# Altium PCB panel.PcbDoc
Units mil, origin at the board's own origin, x right, y up, seen from the top; angles counter-clockwise.
Board outline 6000 x 4000 mil, 2 copper layers (Top Layer, Bottom Layer); 11 components, 14 nets, 45 pads, 0 vias.
Unrouted connection lines stored in the file: 26.
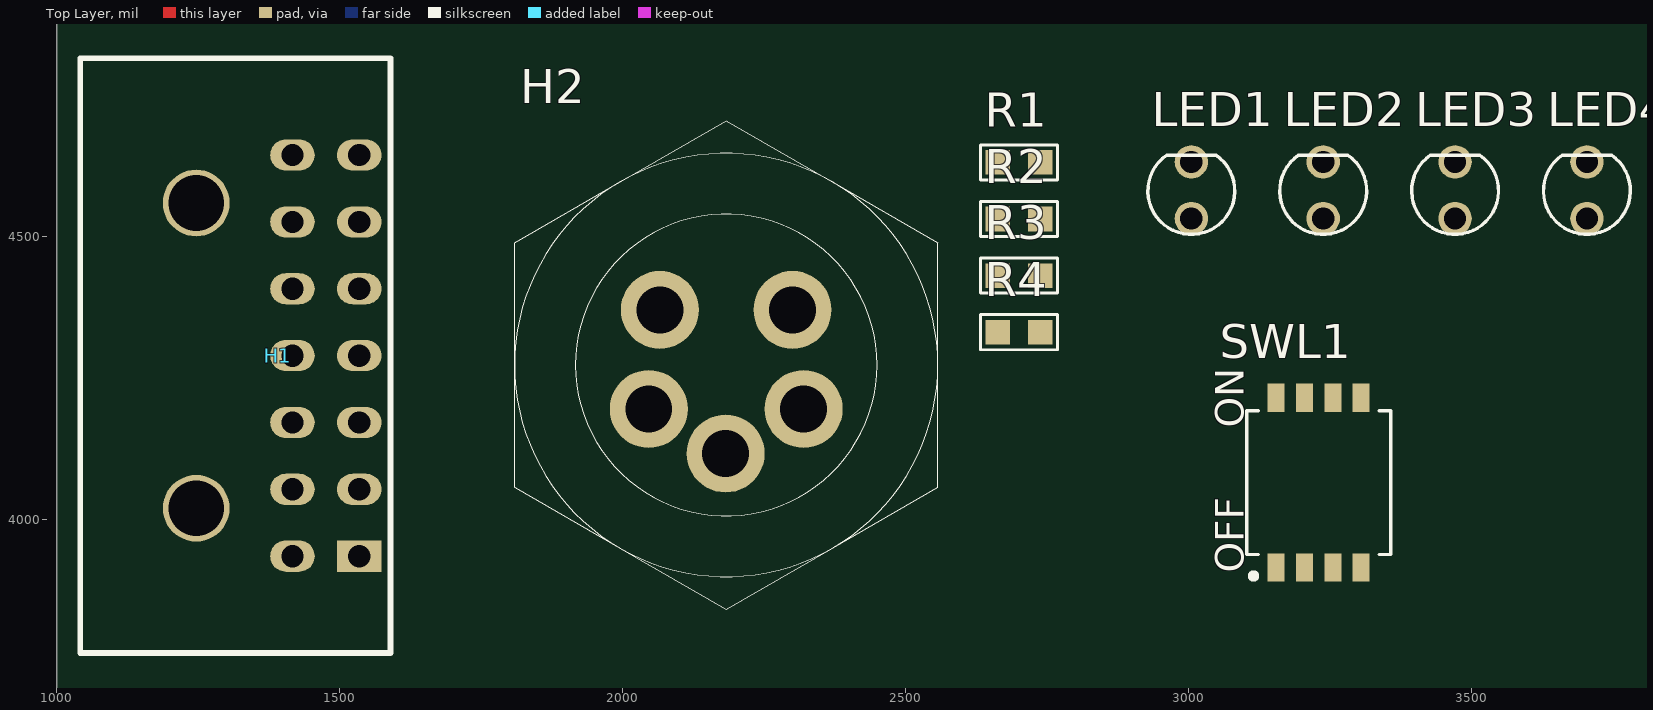
[diagram p0: Top Layer view]
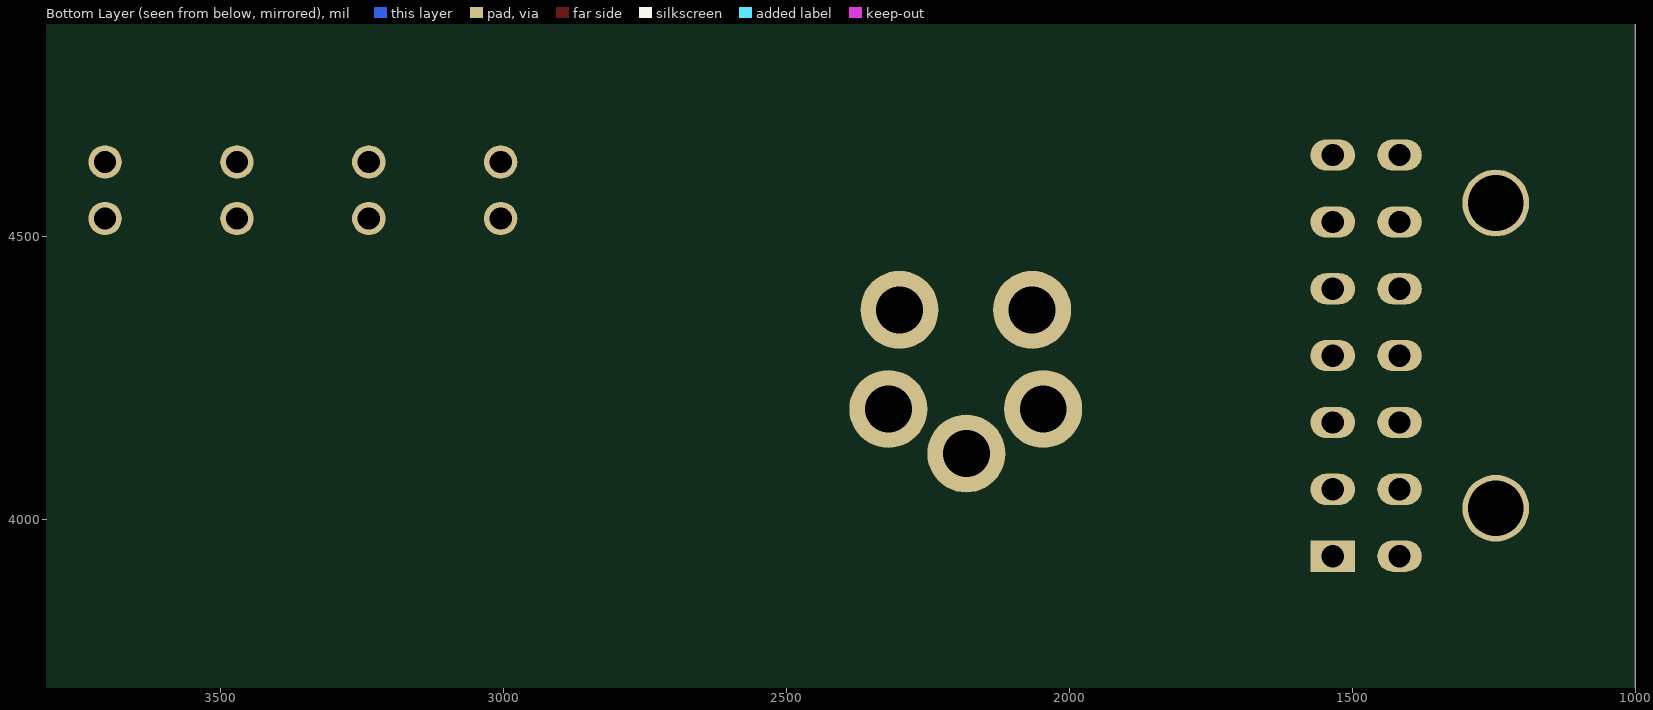
[diagram p1: Bottom Layer view, seen from below]

## Layer stack, top to bottom
Top Solder: solder mask 0.4, Solder Resist, Dk 3.5
Top Layer: signal copper 1.4
Dielectric 1: dielectric 12.6, FR-4, Dk 4.8
Bottom Layer: signal copper 1.4
Bottom Solder: solder mask 0.4, Solder Resist, Dk 3.5

## Board outline
1000,1000 7000,1000 7000,5000 1000,5000

## Design rules (kind name [scope] priority, off if disabled: settings)
Clearance [All] p1: gap=10 ignorepadtopadclearanceinfootprint=FALSE
DiffPairsRouting [All] p1: maxlimit=10 minlimit=10 mostfreqgap=10 toplayer_minwidth=15 toplayer_maxwidth=15 toplayer_prefwidth=15 bottomlayer_minwidth=15 bottomlayer_maxwidth=15 bottomlayer_prefwidth=15 maxuncoupledlength=500
PolygonConnect [All] p1: connectstyle=Relief reliefconductorwidth=10 reliefentries=4 polygonreliefangle="90 Angle" airgapwidth=10
RoutingVias [All] p1: holewidth=28 width=50 viastyle="Through Hole" minholewidth=28 minwidth=50 maxholewidth=28 maxwidth=50
SolderMaskExpansion [All] p1: expansion=4 istentingtop=FALSE
SupplyNets "Schematic Supply Nets_3" [InNet('12V')] p1: voltage=0.000
SupplyNets "Schematic Supply Nets_2" [InNet('3.3V')] p2: voltage=0.000
SupplyNets "Schematic Supply Nets_1" [InNet('GND-ISO')] p3: voltage=0.000
SupplyNets "Schematic Supply Nets" [InNet('GND')] p4: voltage=0.000
Width [All] p1: maxlimit=10 minlimit=10 preferedwidth=10
29 further rules are at their usual default settings.

## Classes and differential pairs
differential pair CAN: +CAN_P -CAN_N

## Components (designator, comment, footprint, x,y, rotation, side; value= is the part's Value field where it differs from the comment)
H1 "MHDR_2X07" "miniATX 2 × 7" 1535,3935 r180 top
H2 "GTX16-5" GX16-5PIN 2183.19,4272.76 r90 top
LED1 "Red" "LED 3mm" 3001.06,4580 r0 top
LED2 "Red" "LED 3mm" 3234.04,4580 r0 top
LED3 "Red" "LED 3mm" 3467.02,4580 r0 top
LED4 "Red" "LED 3mm" 3700,4580 r0 top
R1 "10K" RES0603 2705,4625 r0 top
R2 "10K" RES0603 2705,4525 r0 top
R3 "10K" RES0603 2705,4425 r0 top
R4 "10K" RES0603 2705,4325 r0 top
SWL1 "1571983-4" SW4_1571983_4P_TEC 3230,4065 r90 top

## Footprints (in the part's own frame and the unit in brackets; to place one, negate y for a bottom-side part, rotate by r counter-clockwise, add the part's x,y. Pads: shape width x height; smd on the part's side, far side on the other; paste and mask are expansions set on the pad)
GX16-5PIN [mm]
  round 3.5 hole 2.1 paste-2539.97 mask+0: 1(2.475,-2.975) 2(-1.975,-3.475) 3(-3.975,0.025) 4(-1.975,3.475) 5(2.475,2.975)
  silkscreen extent -10.97,-9.5 10.97,9.5, body extent -10.97,-9.5 10.97,9.5, height 16.6
"LED 3mm" [mm]
  round 1.5 hole 1: 1(0.1,1.31) 2(0.1,-1.23)
  silkscreen extent -1.85,-1.94 2.05,1.61, body extent -1.85,-1.93 2.05,1.64, height 10.3
"miniATX 2 × 7" [mm]
  round 3 hole 2.5: 0(7.32,-2.15) 0(7.32,-15.85)
  rect 2x1.4 hole 1: 1(0,0)
  oval 2x1.4 hole 1: 2(0,-3) 3(0,-6) 4(0,-9) 5(0,-12) 6(0,-15) 7(0,-18) 8(3,0) 9(3,-3) 10(3,-6) 11(3,-9) 12(3,-12) 13(3,-15) 14(3,-18)
  silkscreen extent -1.4,-22.34 12.52,4.34, body extent -0.33,-21.64 11.91,3.56, height 8.83
RES0603 [mm]
  rect 1.1x1.1 smd: 1(0.833,0.145) 2(-1.067,0.145)
  silkscreen extent -1.84,-0.64 1.61,0.93, body extent -0.97,-0.33 0.73,0.62, height 0.6
SW4_1571983_4P_TEC [mil]
  rect 50x30 smd paste+0 mask+0: 1(-150,75) 2(-150,25) 3(-150,-25) 4(-150,-75) 5(150,-75) 6(150,-25) 7(150,25) 8(150,75)
  silkscreen extent -170,-127 127,127, body extent -170,-124 150,120, height 91

## Part data
H1: library part "HDR_mini_2 × 7", "Male Header 2X07"
H2: library part Header1*5, LatestRevisionDate=17-Jul-2002, LatestRevisionNote="Re-released for DXP Platform.", Publisher="Altium Limited"
LED1 LED2 LED3 LED4: library part LED, "LED", Adding Date=1387/12/22, Color=Red, Designer="Saeid Jorablo", Organazation=ControTec, Size="SMD 0603"
R1 R2 R3 R4: library part Resistor, "0603,0.1W", LatestRevisionDate=17-Jul-2002, LatestRevisionNote="Re-released for DXP Platform.", PackageReference=AXIAL-0.5, Published=8-Jun-2000, Publisher="Altium Limited"
SWL1: "GDH04S04=DIP SWITCH", Manufacturer_Name="TE Connectivity", Copyright="Copyright (C) 2025 Ultra Librarian. All rights reserved.", Manufacturer_Part_Number=1571983-4, RefDes=RefDes, Type=Type

## Nets (pads, with @x,y where several pads share a name; then routed paths per layer and width w, separated by ;. In a path a pad name is that pad's centre, name@x,y a point inside that pad or via, vN(x,y) a via of type N, cw(c..) or ccw(c..) an arc to the next point about the centre after c; other vN are vias at no path point)
3.3V: H1.7 R1.2 R2.2 R3.2 R4.2
12V: H1.1 H1.2 H2.1
CAN_N: H1.3 H2.4
CAN_P: H1.10 H2.3
GND: H1.14 SWL1.1 SWL1.2 SWL1.3 SWL1.4
GND-ISO: H1.8 H1.9 H2.2
NetLED1_1: LED1.1 R1.1
NetLED2_1: LED2.1 R2.1
NetLED3_1: LED3.1 R3.1
NetLED4_1: LED4.1 R4.1
SW1: H1.5 LED4.2 SWL1.5
SW2: H1.6 LED3.2 SWL1.6
SW3: H1.12 LED2.2 SWL1.7
SW4: H1.13 LED1.2 SWL1.8
pads on no net: H1.0 H1.4 H1.11 H2.5

## Text inside footprints (layer, text, board x,y; h text height)
SWL1: Top Overlay "ON" at 3097.95,4162 h50 r90; Top Overlay "OFF" at 3097.95,3905.5 h50 r90